# Altium PCB JacdacEc30Hub10x40 114.PcbDoc
Units mm, origin at the board's own origin, x right, y up, seen from the top; angles counter-clockwise.
Board outline 18 x 45 mm, 2 copper layers (Top Layer, Bottom Layer), stack 1.525 mm thick; 11 components, 3 nets, 79 pads, 20 vias.
Unrouted connection lines stored in the file: 7.
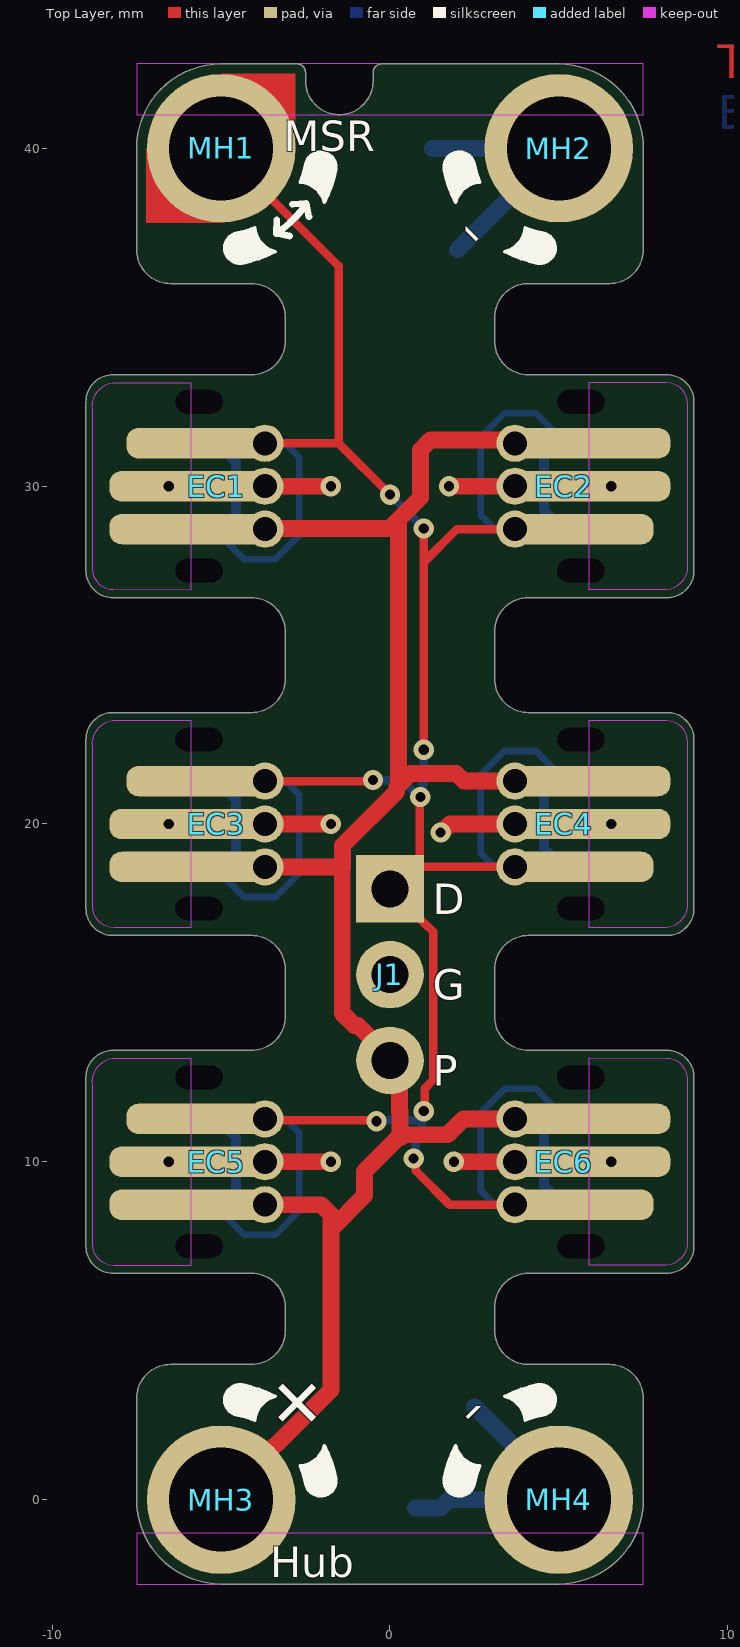
[diagram p0: Top Layer view]
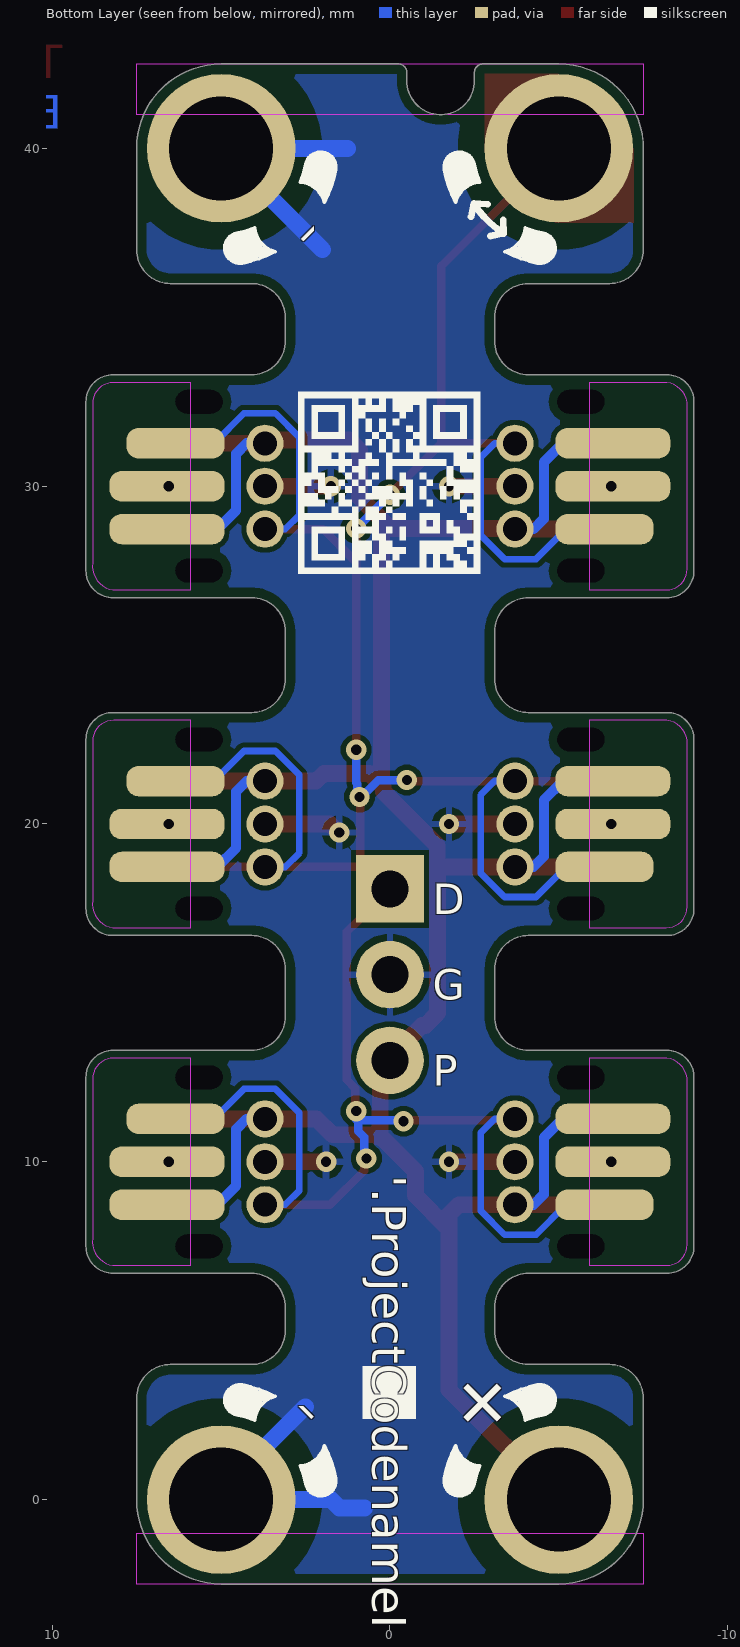
[diagram p1: Bottom Layer view, seen from below]

## Layer stack, top to bottom
Top Solder: solder mask 0.0102, Solder Resist, Dk 3.5
Top Layer: signal copper 0.0356
Dielectric 1: core 1.454, FR-4, Dk 4.2
Bottom Layer: signal copper 0.0356
Bottom Solder: solder mask 0.0102, Solder Resist, Dk 3.5

## Board outline
-7.5,0 ccw(c-5,0) -5,-2.5 5,-2.5 ccw(c5,0) 7.5,0 7.5,3.03 7.5,3 ccw(c6.5,3) 6.5,4 4.1,4 cw(c4.1,5) 3.1,5 3.1,5.7 cw(c4.1,5.7) 4.1,6.7 8.2,6.7 ccw(c8.2,7.5) 9,7.5 9,12.5 ccw(c8.2,12.5) 8.2,13.3 4.1,13.3 4.098,13.3 cw(c4.098,14.3) 3.098,14.3 3.1,14.3 3.1,15.7 cw(c4.1,15.7) 4.1,16.7 8.2,16.7 ccw(c8.2,17.5) 9,17.5 9,22.5 ccw(c8.2,22.5) 8.2,23.3 4.1,23.3 4.098,23.3 cw(c4.098,24.3) 3.098,24.3 3.1,24.3 3.1,25.7 cw(c4.1,25.7) 4.1,26.7 8.2,26.7 ccw(c8.2,27.5) 9,27.5 9,32.5 ccw(c8.2,32.5) 8.2,33.3 4.1,33.3 4.098,33.3 cw(c4.098,34.3) 3.098,34.3 3.1,34.3 3.1,35 cw(c4.1,35) 4.1,36 6.5,36 ccw(c6.5,37) 7.5,37 7.5,36.97 7.5,40 ccw(c5,40) 5,42.5 -0.25,42.5 ccw(c-0.25,42.25) -0.5,42.25 -0.5,42 cw(c-1.5,42) -2.5,42 -2.5,42.25 ccw(c-2.75,42.25) -2.75,42.5 -5,42.5 ccw(c-5,40) -7.5,40 -7.5,36.97 -7.5,37 ccw(c-6.5,37) -6.5,36 -4.1,36 cw(c-4.1,35) -3.1,35 -3.1,34.3 -3.098,34.3 cw(c-4.098,34.3) -4.098,33.3 -4.1,33.3 -8.2,33.3 ccw(c-8.2,32.5) -9,32.5 -9,27.5 ccw(c-8.2,27.5) -8.2,26.7 -4.1,26.7 cw(c-4.1,25.7) -3.1,25.7 -3.1,24.3 -3.098,24.3 cw(c-4.098,24.3) -4.098,23.3 -4.1,23.3 -8.2,23.3 ccw(c-8.2,22.5) -9,22.5 -9,17.5 ccw(c-8.2,17.5) -8.2,16.7 -4.1,16.7 cw(c-4.1,15.7) -3.1,15.7 -3.1,14.3 -3.098,14.3 cw(c-4.098,14.3) -4.098,13.3 -4.1,13.3 -8.2,13.3 ccw(c-8.2,12.5) -9,12.5 -9,7.5 ccw(c-8.2,7.5) -8.2,6.7 -4.1,6.7 cw(c-4.1,5.7) -3.1,5.7 -3.1,5 cw(c-4.1,5) -4.1,4 -6.5,4 ccw(c-6.5,3) -7.5,3 -7.5,3.03

## Design rules (kind name [scope] priority, off if disabled: settings)
AssemblyTestPointUsage [All] p1: valid=2
BoardOutlineClearance [not (HasFootprint('MOUSEBITE_CONNECTOR_3X2') or HasFootprint('MOUSEBITE_NOCONNECTOR_3'))] p1: gap=0.3 ignorepadtopadclearanceinfootprint=FALSE except(0: Arc-SplitContinuation Track-SplitContinuation SMDPad-SplitContinuation THPad-SplitContinuation Via-SplitContinuation Fill-SplitContinuation Poly-SplitContinuation Text-OutlineEdge Text-CavityEdge Text-CutoutEdge Text-SplitBarrior Text-SplitContinuation; 0.15: Region-OutlineEdge Region-CavityEdge Region-CutoutEdge Region-SplitBarrior Region-SplitContinuation)
Clearance "Clearance MH" [InComponent('MH1') OR InComponent('MH2') OR InComponent('MH3') OR InComponent('MH4')] p1: gap=0.15 ignorepadtopadclearanceinfootprint=FALSE except(0.254: Arc-Hole Track-Hole SMDPad-Hole THPad-Hole Via-Hole Fill-Hole Poly-Hole Region-Hole Text-Hole; 0.8: Arc-Fill Arc-Poly Arc-Region Track-Fill Track-Poly Track-Region SMDPad-Fill SMDPad-Poly SMDPad-Region THPad-Fill THPad-Poly THPad-Region Via-Fill Via-Poly Via-Region Fill-Fill Fill-Poly Fill-Region Poly-Poly Poly-Region Region-Region)
Clearance [All] p2: gap=0.15 ignorepadtopadclearanceinfootprint=FALSE except(0.254: Arc-Hole Track-Hole SMDPad-Hole THPad-Hole Via-Hole Fill-Hole Poly-Hole Region-Hole Text-Hole)
ComponentClearance [All] p1: gap=0.01 collisioncheckmode=3 verticalgap=0.2 showdistances=FALSE
DiffPairsRouting [All] p1: maxlimit=2 minlimit=0.15 mostfreqgap=0.15 toplayer_minwidth=0.15 toplayer_maxwidth=2 toplayer_prefwidth=0.15 bottomlayer_minwidth=0.15 bottomlayer_maxwidth=2 bottomlayer_prefwidth=0.15 substack1={CB9D278B-8BF5-444A-AAF4-837A2A9DF42D} toplayer_{cb9d278b-8bf5-444a-aaf4-837a2a9df42d}_minwidth=0.381 toplayer_{cb9d278b-8bf5-444a-aaf4-837a2a9df42d}_maxwidth=0.381 toplayer_{cb9d278b-8bf5-444a-aaf4-837a2a9df42d}_prefwidth=0.381 bottomlayer_{cb9d278b-8bf5-444a-aaf4-837a2a9df42d}_minwidth=0.381 bottomlayer_{cb9d278b-8bf5-444a-aaf4-837a2a9df42d}_maxwidth=0.381 bottomlayer_{cb9d278b-8bf5-444a-aaf4-837a2a9df42d}_prefwidth=0.381 substack2={826B8647-A721-4255-895A-19F9591B9CD1} toplayer_{826b8647-a721-4255-895a-19f9591b9cd1}_minwidth=0.381 toplayer_{826b8647-a721-4255-895a-19f9591b9cd1}_maxwidth=0.381 toplayer_{826b8647-a721-4255-895a-19f9591b9cd1}_prefwidth=0.381 bottomlayer_{826b8647-a721-4255-895a-19f9591b9cd1}_minwidth=0.381 bottomlayer_{826b8647-a721-4255-895a-19f9591b9cd1}_maxwidth=0.381 bottomlayer_{826b8647-a721-4255-895a-19f9591b9cd1}_prefwidth=0.381 substack3={E64FCAF4-1BC8-437D-B1E0-0E5F2DC0F59E} toplayer_{e64fcaf4-1bc8-437d-b1e0-0e5f2dc0f59e}_minwidth=0.381 toplayer_{e64fcaf4-1bc8-437d-b1e0-0e5f2dc0f59e}_maxwidth=0.381 toplayer_{e64fcaf4-1bc8-437d-b1e0-0e5f2dc0f59e}_prefwidth=0.381 bottomlayer_{e64fcaf4-1bc8-437d-b1e0-0e5f2dc0f59e}_minwidth=0.381 bottomlayer_{e64fcaf4-1bc8-437d-b1e0-0e5f2dc0f59e}_maxwidth=0.381 bottomlayer_{e64fcaf4-1bc8-437d-b1e0-0e5f2dc0f59e}_prefwidth=0.381 substack4={E61CE66C-507C-4E1E-8E83-C905434AFC1C} toplayer_{e61ce66c-507c-4e1e-8e83-c905434afc1c}_minwidth=0.381 toplayer_{e61ce66c-507c-4e1e-8e83-c905434afc1c}_maxwidth=0.381 toplayer_{e61ce66c-507c-4e1e-8e83-c905434afc1c}_prefwidth=0.381 bottomlayer_{e61ce66c-507c-4e1e-8e83-c905434afc1c}_minwidth=0.381 bottomlayer_{e61ce66c-507c-4e1e-8e83-c905434afc1c}_maxwidth=0.381 bottomlayer_{e61ce66c-507c-4e1e-8e83-c905434afc1c}_prefwidth=0.381 maxuncoupledlength=25
FabricationTestPointUsage [All] p1: valid=2 allowmultiple=FALSE
HoleSize [All] p1: absolutevalues=TRUE maxlimit=5 minlimit=0.3 maxpercent=80.000 minpercent=20.000
HoleToHoleClearance [IsPad and not (HasFootprint('MOUSEBITE_CONNECTOR_3X2') or HasFootprint('MOUSEBITE_NOCONNECTOR_3')) vs IsPad and not  (HasFootprint('MOUSEBITE_CONNECTOR_3X2') or HasFootprint('MOUSEBITE_NOCONNECTOR_3'))] p1: gap=0.5 allowstackedmicrovias=TRUE
MinimumAnnularRing [All] p1: minimumring=0.15
MinimumSolderMaskSliver [All] p1: minsoldermaskwidth=0.005
PlaneClearance [All] p1: clearance=0.3
PlaneConnect [All] p1: planeconnectstyle=Relief reliefexpansion=0.5 reliefentries=4 reliefconductorwidth=0.3 reliefairgap=0.3
PolygonConnect "PolygonConnect MH" [InComponent('MH1') OR InComponent('MH2') OR InComponent('MH3') OR InComponent('MH4')] p1: connectstyle=Relief reliefconductorwidth=0.5 reliefentries=4 polygonreliefangle="90 Angle" airgapwidth=0.8
PolygonConnect [All] p2: connectstyle=Relief reliefconductorwidth=0.2 reliefentries=4 polygonreliefangle="90 Angle" airgapwidth=0.2
RoutingVias [All] p1: holewidth=0.3 width=0.6 viastyle="Through Hole" minholewidth=0.3 minwidth=0.6 maxholewidth=0.3 maxwidth=0.8
SilkToSilkClearance [All] p1: silktosilkclearance=0.001
SilkToSolderMaskClearance [IsPad] p1: minsilkscreentomaskgap=0.05 clearancetoexposedcopper=TRUE
SolderMaskExpansion [All] p1: expansion=0.075 istentingtop=FALSE
UnRoutedNet [All] p1: checkbadconnections=TRUE
Width [All] p1: maxlimit=2 minlimit=0.15 preferedwidth=0.15 substack1={CB9D278B-8BF5-444A-AAF4-837A2A9DF42D} substack2={826B8647-A721-4255-895A-19F9591B9CD1} substack3={E64FCAF4-1BC8-437D-B1E0-0E5F2DC0F59E} substack4={E61CE66C-507C-4E1E-8E83-C905434AFC1C} minimp=50.000000 maximp=50.000000 favimp=50.000000
18 further rules are at their usual default settings.

## Components (designator, comment, footprint, x,y, rotation, side; value= is the part's Value field where it differs from the comment)
EC1 "Jacdac edge connector" JACDAC_EDGE_CONNECTOR_TRACES_0.15MM -3.15,30 r90 top
EC2 "Jacdac edge connector" JACDAC_EDGE_CONNECTOR_TRACES_0.15MM 3.15,30 r270 top
EC3 "Jacdac edge connector" JACDAC_EDGE_CONNECTOR_TRACES_0.15MM -3.15,20 r90 top
EC4 "Jacdac edge connector" JACDAC_EDGE_CONNECTOR_TRACES_0.15MM 3.15,20 r270 top
EC5 "Jacdac edge connector" JACDAC_EDGE_CONNECTOR_TRACES_0.15MM -3.15,10 r90 top
EC6 "Jacdac edge connector" JACDAC_EDGE_CONNECTOR_TRACES_0.15MM 3.15,10 r270 top
J1 "HDR 3x1 0.1\"" "Generic 1x3 2.54mm header" 0,15.54 r90 top
MH1 "MH_6.5MMK_4.5MMC_3.0MMD_PTH" MH_6.5MMK_4.5MMC_3.0MMD_PTH -5,40 r90 top
MH2 "MH_6.5MMK_4.5MMC_3.0MMD_PTH" MH_6.5MMK_4.5MMC_3.0MMD_PTH 5,40 r90 top
MH3 "MH_6.5MMK_4.5MMC_3.0MMD_PTH" MH_6.5MMK_4.5MMC_3.0MMD_PTH -5,0 r90 top
MH4 "MH_6.5MMK_4.5MMC_3.0MMD_PTH" MH_6.5MMK_4.5MMC_3.0MMD_PTH 5,0 r90 top

## Footprints (in the part's own frame and the unit in brackets; to place one, negate y for a bottom-side part, rotate by r counter-clockwise, add the part's x,y. Pads: shape width x height; smd on the part's side, far side on the other; paste and mask are expansions set on the pad)
"Generic 1x3 2.54mm header" [mm] "1x3 2.54mm 0.1\" header vertical th"
  rect 2x2 hole 1.1: 1(2.54,0)
  round 2 hole 1.1: 2(0,0) 3(-2.54,0)
  body extent -3.81,-1.27 3.81,1.27, height 8.64
JACDAC_EDGE_CONNECTOR_TRACES_0.15MM [mm] "Jacdac 3 pin connector with 0.15mm track-and-gap traces"
  rrect78% 0.9x2.9 smd far side paste-1 mask+0: 1(-1.27,3.2)
  rrect78% 0.9x4.3 smd paste-1 mask+0: 1(1.27,2.5)
  round 1.1 hole 0.71 paste-0.254 mask+0: 1(1.27,0.55) 2(0,0.55) 3(-1.27,0.55)
  rrect78% 0.9x3.4 smd far side paste-1 mask+0: 2(0,3.45) 2(0,3.45) 3(1.27,3.45)
  rrect78% 0.9x4.8 smd paste-1 mask+0: 2(0,2.75) 3(-1.27,2.75)
  round 0 hole 0.7 slot 1.4 at 90 deg unplated: ""(-2.5,2.5) ""(2.5,2.5)
  Top Layer keep-out region: -3.075,2.75 -3.07,5.033 -2.987,5.341 -2.761,5.567 -2.453,5.65 -2.453,5.65 2.27,5.65 2.545,5.635 2.794,5.516 2.978,5.31 3.07,5.05 3.07,5.05 3.07,2.75
  Bottom Layer lines w0.2: -1.27,3.175 -1.27,2.063 -2.159,1.174 -2.159,0.245 -1.448,-0.466 0.254,-0.466 0.854,-0.466 1.27,-0.05 1.27,0.55 ; -1.27,0.85 -1.126,0.85
  Bottom Layer lines w0.3: 1.27,1.962 0.713,1.405 -0.965,1.405 -1.27,1.1 -1.27,0.55
  Bottom Layer keep-out region: -3.07,2.75 -3.07,5.033 -3.023,5.269 -2.889,5.469 -2.689,5.603 -2.453,5.65 -2.453,5.65 2.27,5.65 2.546,5.635 2.794,5.516 2.978,5.31 3.07,5.05 3.07,5.05 3.07,2.75
MH_6.5MMK_4.5MMC_3.0MMD_PTH [mm] "Jacdac mounting hole 6.5mm clearance, 4.5 annualar ring and 3.0mm PTH"
  round 4.4 hole 3.08 mask+0.3: 1(0,0)

## Part data
EC1 EC2 EC3 EC4 EC5 EC6: "3 pin Jacdac edge connector 1.27mm pitch", Manufacturer Part Number=n/a, ComponentLink1Description="Yuliang JACDAC cable connector drawing online", ComponentLink1URL=https://github.com/microsoft/jacdac-ddk/tree/main/connector, ComponentLink2Description="JACDAC PCB edge connector spec onlin", ComponentLink2URL=https://github.com/microsoft/jacdac-ddk/tree/main/connector, Created By="D. Gakure & S. Hodges", PCB Type="1.6mm FR4"
J1: library part "Header Multicomp 2211S-03G-whitesch", "2.54mm, 3x1 way, vertical, square pin, gold plate", Manufacturer=Multicomp, Manufacturer Part Number=2211S-03G, Supplier Part Number 1=1593412, ComponentLink1Description="header strip datasheet", ComponentLink1URL=http://www.farnell.com/datasheets/1518407.pdf, Created By=daclethe, Pricing 1="50=0.0701, 100=0.0588, 500=0.0421, 1000=0.0289, 2000=0.0262, 6000=0.0238, 20000=0.0206 (GBP)", RoHS=YES, Stock 1=12851, Supplier 1=Farnell
MH1 MH2 MH3 MH4: "Mounting Hole 6.5mm keepout, 4.5mm annualar ring and 3.0mm Drill PTH"

## Via types
v1: diameter 0.6, hole 0.3, Top Layer to Bottom Layer, tented both sides, 20 vias

## Nets (pads, with @x,y where several pads share a name; then routed paths per layer and width w, separated by ;. In a path a pad name is that pad's centre, name@x,y a point inside that pad or via, vN(x,y) a via of type N, cw(c..) or ccw(c..) an arc to the next point about the centre after c; other vN are vias at no path point)
GND: EC1.2 EC2.2 EC3.2 EC4.2 EC5.2 EC6.2 J1.2 MH2.1 MH4.1 | length 28
  Top Layer w0.5: EC5.2@-3.7,10 v1(-1.75,10) ; EC3.2@-3.7,20 v1(-1.75,20) ; EC1.2@-3.7,30 v1(-1.75,30) ; v1(1.5,19.75) 1.527,19.75 1.777,20 EC4.2@3.7,20 ; v1(1.75,30) EC2.2@3.7,30 ; v1(1.89,10) EC6.2@3.7,10
  Bottom Layer w0.5: 0.75,-0.25 1.5,-0.25 1.75,0 MH4.1 5,0.25 2.5,2.75 ; 1.25,40 MH2.1 2,37
  other v1: -6.55,10 6.55,10 -6.55,20 6.55,20 -6.55,30 6.55,30
JD_DATA: EC1.1 EC2.1 EC3.1 EC4.1 EC5.1 EC6.1 J1.1 MH1.1 | length 59.7
  Top Layer w0.25: EC3.1@-5.65,21.27 -3.7,21.27 -0.53,21.27 v1(-0.5,21.3) ; MH1.1 -1.52,36.52 -1.52,31.27 ; EC5.1@-3.7,11.27 -3.665,11.235 -0.435,11.235 v1(-0.4,11.2) ; EC1.1@-3.7,31.27 -1.52,31.27 ; v1(0,29.75) -1.52,31.27 ; v1(0.7,10.1) 0.767,10.033 0.767,9.733 1.77,8.73 EC6.1@3.7,8.73 ; v1(0.9,20.8) 0.875,20.775 0.875,18.955 J1.1@0.65,18.73 ; v1(1,11.5) 1.029,11.529 1.029,12.175 1.275,12.421 1.275,16.818 1.138,16.956 1.124,16.956 J1.1 J1.1@0.25,18.33 ; v1(1,22.2) 1,27.75 ; v1(1,28.75) 1,27.75 ; EC2.1@3.7,28.73 1.98,28.73 1,27.75 ; EC4.1@5.65,18.73 3.7,18.73 J1.1@0.65,18.73 ; J1.1@0.25,18.33 J1.1@0.65,18.73 ; J1.1@0.25,18.33 J1.1@0.65,18.73
  Bottom Layer w0.25: v1(-0.5,21.3) 0.345,21.3 0.845,20.8 v1(0.9,20.8) 0.967,20.867 0.967,21.192 1,21.225 v1(1,22.2) ; v1(-0.4,11.2) -0.375,11.225 v1@0.975,11.225 ; v1(0,29.75) v1(1,28.75) ; v1(0.7,10.1) 0.767,10.167 0.767,10.734 0.933,10.9 0.933,11.183 v1@0.975,11.225 ; v1(1,11.5) 1,11.25 v1@0.975,11.225
JD_PWR: EC1.3 EC2.3 EC3.3 EC4.3 EC5.3 EC6.3 J1.3 MH3.1 | length 67.3
  Top Layer w0.5: EC5.3@-5.9,8.73 -3.7,8.73 -2.043,8.73 -1.75,8.437 -1.75,8 ; EC3.3@-5.9,18.73 -3.7,18.73 -1.412,18.73 ; EC1.3@-5.9,28.73 -3.7,28.73 -3.68,28.75 -0.01,28.75 0.24,29 0.9,29.66 0.9,31.072 1.193,31.365 3.605,31.365 3.7,31.27 EC2.3@5.9,31.27 ; MH3.1 -1.75,3.25 -1.75,8 ; 0.25,21.14 0.25,28.99 ; 0.34,10.73 0.41,10.8 1.7,10.8 2.17,11.27 3.7,11.27 EC6.3@5.9,11.27 ; EC4.3@5.9,21.27 3.7,21.27 2.189,21.27 1.959,21.5 0.61,21.5 0.2,21.09 0.2,20.96 -1.4,19.36 -1.4,18.742 -1.412,18.73 ; -1.75,8 -0.75,9 -0.75,9.72 0.3,10.77 0.3,10.8 0.3,11.49 0.287,11.503 0.287,12.713 J1.3 0,13.094 -0.943,14.037 -1.051,14.037 -1.412,14.398 -1.412,18.73
pads on no net: EC1. EC2. EC3. EC4. EC5. EC6.

## Polygon pours and split planes (outlines as drawn)
GND on Bottom Layer "NONET_L-01_P-001" (solid, pour order 2): -7.5,0 ccw(c-5,0) -5,-2.5 5,-2.5 ccw(c5,0) 7.5,0 7.5,3.03 7.5,3 ccw(c6.5,3) 6.5,4 4.1,4 cw(c4.1,5) 3.1,5 3.1,5.7 cw(c4.1,5.7) 4.1,6.7 8.2,6.7 ccw(c8.2,7.5) 9,7.5 9,12.5 ccw(c8.2,12.5) 8.2,13.3 4.1,13.3 4.098,13.3 cw(c4.098,14.3) 3.098,14.3 3.1,14.3 3.1,15.7 cw(c4.1,15.7) 4.1,16.7 8.2,16.7 ccw(c8.2,17.5) 9,17.5 9,22.5 ccw(c8.2,22.5) 8.2,23.3 4.1,23.3 4.098,23.3 cw(c4.098,24.3) 3.098,24.3 3.1,24.3 3.1,25.7 cw(c4.1,25.7) 4.1,26.7 8.2,26.7 ccw(c8.2,27.5) 9,27.5 9,32.5 ccw(c8.2,32.5) 8.2,33.3 4.1,33.3 4.098,33.3 cw(c4.098,34.3) 3.098,34.3 3.1,34.3 3.1,35 cw(c4.1,35) 4.1,36 6.5,36 ccw(c6.5,37) 7.5,37 7.5,36.97 7.5,40 ccw(c5,40) 5,42.5 -0.25,42.5 ccw(c-0.25,42.25) -0.5,42.25 -0.5,42 cw(c-1.5,42) -2.5,42 -2.5,42.25 ccw(c-2.75,42.25) -2.75,42.5 -5,42.5 ccw(c-5,40) -7.5,40 -7.5,36.97 -7.5,37 ccw(c-6.5,37) -6.5,36 -4.1,36 cw(c-4.1,35) -3.1,35 -3.1,34.3 -3.098,34.3 cw(c-4.098,34.3) -4.098,33.3 -4.1,33.3 -8.2,33.3 ccw(c-8.2,32.5) -9,32.5 -9,27.5 ccw(c-8.2,27.5) -8.2,26.7 -4.1,26.7 cw(c-4.1,25.7) -3.1,25.7 -3.1,24.3 -3.098,24.3 cw(c-4.098,24.3) -4.098,23.3 -4.1,23.3 -8.2,23.3 ccw(c-8.2,22.5) -9,22.5 -9,17.5 ccw(c-8.2,17.5) -8.2,16.7 -4.1,16.7 cw(c-4.1,15.7) -3.1,15.7 -3.1,14.3 -3.098,14.3 cw(c-4.098,14.3) -4.098,13.3 -4.1,13.3 -8.2,13.3 ccw(c-8.2,12.5) -9,12.5 -9,7.5 ccw(c-8.2,7.5) -8.2,6.7 -4.1,6.7 cw(c-4.1,5.7) -3.1,5.7 -3.1,5 cw(c-4.1,5) -4.1,4 -6.5,4 ccw(c-6.5,3) -7.5,3 -7.5,3.03
no net on Fabrication notes "NONET_L-01_P-001" (hatched 45Degree grid 0.6 track 0.01): 9.5,3 3,3 2.985,3 2.989,37.01 3,37 9.5,37 9.489,37.01
no net on Fabrication notes "NONET_L-01_P-001" (hatched 45Degree grid 0.6 track 0.01): -9.5,3 -3,3 -2.985,3 -2.989,37.01 -3,37 -9.5,37 -9.489,37.01

## Keep-outs
Keep-Out Layer:
  region: 7.5,-2.5 7.5,-1 -7.5,-1 -7.5,-2.5
  region: 7.5,41 7.5,42.5 -7.5,42.5 -7.5,41

## Other copper
Top Layer:
  region net JD_DATA: -7.215,37.8 -4.9,37.8 -2.8,39.9 -2.8,42.215 -4.985,42.215 -7.215,39.985
  text "Top Layer" at 9.701,41.75 h1.7
Bottom Layer:
  pour cut-out: -5,-2.5 ccw(c-5,0) -2.5,0 ccw(c-5,0) -5,2.5 ccw(c-5,0) -7.5,0 ccw(c-5,0)
  pour cut-out: 5,-2.5 ccw(c5,0) 7.5,0 ccw(c5,0) 5,2.5 ccw(c5,0) 2.5,0 ccw(c5,0)
  pour cut-out: 5,37.5 ccw(c5,40) 7.5,40 ccw(c5,40) 5,42.5 ccw(c5,40) 2.5,40 ccw(c5,40)
  pour cut-out: -5,37.5 ccw(c-5,40) -2.5,40 ccw(c-5,40) -5,42.5 ccw(c-5,40) -7.5,40 ccw(c-5,40)
  text "Bottom Layer" at 9.7,40.25 h1.7

## Silkscreen, mask and mechanical layers (free items; w line width, h text height)
Top Overlay:
  lines w0.1: -4.374,3.393 cw(c-5,0) -3.399,3.056 ccw(c-3.206,2.28) -4.003,2.347 ; -4.374,36.607 ccw(c-5,40) -3.399,36.944 cw(c-3.206,37.72) -4.003,37.653 ; -4.352,3.388 ccw(c-4.446,2.948) -4.539,2.508 cw(c-5,0) -4.027,2.357 ; -4.352,36.612 cw(c-4.446,37.052) -4.539,37.492 ccw(c-5,40) -4.027,37.643 ; -2.653,0.997 ccw(c-2.72,1.794) -1.944,1.601 cw(c-5,0) -1.607,0.626 ; -2.653,39.003 cw(c-2.72,38.206) -1.944,38.399 ccw(c-5,40) -1.607,39.374 ; -2.643,0.973 cw(c-5,0) -2.492,0.461 ccw(c-2.052,0.554) -1.612,0.648 ; -2.643,39.027 ccw(c-5,40) -2.492,39.539 cw(c-2.052,39.446) -1.612,39.352 ; 1.607,0.626 cw(c5,0) 1.944,1.601 ccw(c2.72,1.794) 2.653,0.997 ; 1.607,39.374 ccw(c5,40) 1.944,38.399 cw(c2.72,38.206) 2.653,39.003 ; 1.612,0.648 ccw(c2.052,0.554) 2.492,0.461 cw(c5,0) 2.643,0.973 ; 1.612,39.352 cw(c2.052,39.446) 2.492,39.539 ccw(c5,40) 2.643,39.027 ; 4.003,2.347 ccw(c3.206,2.28) 3.399,3.056 cw(c5,0) 4.374,3.393 ; 4.003,37.653 cw(c3.206,37.72) 3.399,36.944 ccw(c5,40) 4.374,36.607 ; 4.027,2.357 cw(c5,0) 4.539,2.508 ccw(c4.446,2.948) 4.352,3.388 ; 4.027,37.643 ccw(c5,40) 4.539,37.492 cw(c4.446,37.052) 4.352,36.612
  lines w0.2: -3.352,37.884 -3.366,37.484 ; -2.973,37.408 -3.366,37.484 ; -2.883,38.345 -2.484,38.366 ; -2.401,37.975 -2.484,38.366 ; -3.366,37.484 ccw(c-5,40) -2.484,38.366
  lines w0.33: -4.1,2.555 cw(c-3.759,2.698) -3.685,3.06 ; -4.1,37.445 ccw(c-3.759,37.302) -3.685,36.94 ; -2.445,0.9 ccw(c-2.302,1.241) -1.94,1.315 ; -2.445,39.1 cw(c-2.302,38.759) -1.94,38.685 ; 1.94,1.315 ccw(c2.302,1.241) 2.445,0.9 ; 1.94,38.685 cw(c2.302,38.759) 2.445,39.1 ; 3.685,3.06 cw(c3.759,2.698) 4.1,2.555 ; 3.685,36.94 ccw(c3.759,37.302) 4.1,37.445
  lines w1: -4.43,2.945 cw(c-5,0) -4.285,2.914 ; -4.43,37.055 ccw(c-5,40) -4.285,37.086 ; -2.086,0.715 cw(c-5,0) -2.055,0.57 ; -2.086,39.285 ccw(c-5,40) -2.055,39.43 ; 2.055,0.57 cw(c5,0) 2.086,0.715 ; 2.055,39.43 ccw(c5,40) 2.086,39.285 ; 4.285,2.914 cw(c5,0) 4.43,2.945 ; 4.285,37.086 ccw(c5,40) 4.43,37.055
  text "MSR" at -3.151,39.922 h0.9
  text "-" at 3.643,38.146 h3.5 r135
  text "D" at 1.273,17.33 h0.9
  text "G" at 1.273,14.79 h0.9
  text "P" at 1.273,12.25 h0.9
  text "-" at 3.146,1.357 h3.5 r45
  text "+" at -2.95,1.33 h2.8 r315
  text "Hub" at -3.547,-2.3 h0.9
Bottom Overlay:
  drawing of 247 lines, arcs and shapes, not listed
  text "Bottom Overlay" at 18.3,41.725 h1.7
  text "-" at 3.643,38.146 h3.5 r135
  text "D" at -1.273,17.33 h0.9
  text "G" at -1.273,14.79 h0.9
  text "P" at -1.273,12.25 h0.9
  text "'.ProjectCodenameID'-'.ProjectRevision'" at 0.53,9.595 h1 r90
  text "-" at 3.146,1.357 h3.5 r45
  text "+" at -2.95,1.33 h2.8 r315
Top Paste:
  text "Top Paste" at 18.301,40.318 h1.7
Bottom Paste:
  text "Bottom Paste" at 18.3,38.84 h1.7
Top Solder:
  text "Top Solder (resist)" at 18.301,37.518 h1.7
Bottom Solder:
  text "Bottom Solder (resist)" at 18.3,36.027 h1.7
Drill Guide:
  text "Drill Guide" at 31.725,37.515 h1.7
Dimension:
  circle w0.1: c5,0 r2.2
  circle w0.1: c-5,0 r3.5
  text "Dimension" at 31.725,38.815 h1.7
Fabrication notes:
  lines w0.01: -9.5,3 -3,3 ; -9.5,37 -3,37 ; -9.489,37.01 -9.485,3 ; -2.989,37.01 -2.985,3 ; 2.985,3 2.989,37.01 ; 3,3 9.5,3 ; 3,37 9.5,37 ; 9.485,3 9.489,37.01
  lines w0.1: -7.4,27.5 -6.9,27.5 -5.65,27.5 ; -7.4,32.5 -6.9,32.5 -5.65,32.5 ; 5.65,27.5 6.9,27.5 7.4,27.5 ; 5.65,32.5 6.9,32.5 7.4,32.5
  lines w0.2: -11.25,9.8 -7.4,7.5 -5.65,7.5 ; -11.25,10.2 -7.4,12.5 -5.65,12.5 ; -11.25,19.8 -7.4,17.5 -5.65,17.5 ; -11.25,20.2 -7.4,22.5 -5.65,22.5 ; -11.25,29.8 -7.4,27.5 -5.65,27.5 ; -11.25,30.2 -7.4,32.5 -5.65,32.5 ; -11.25,36 -9.5,36 ; 5.65,7.5 7.4,7.5 11.25,9.8 ; 5.65,12.5 7.4,12.5 11.25,10.2 ; 5.65,17.5 7.4,17.5 11.25,19.8 ; 5.65,22.5 7.4,22.5 11.25,20.2 ; 5.65,27.5 7.4,27.5 11.25,29.8 ; 5.65,32.5 7.4,32.5 11.25,30.2 ; 9.5,36 11.25,36
  text "Fabrication Notes" at 31.725,41.715 h1.7
  text "no board edge pips/ / rat's teeth/mouse bites  / in this region - make  / sure board edge is clean" at -27.397,34 h1.7
  text "no board edge pips/ / rat's teeth/mouse bites  / in this region - make  / sure board edge is clean" at 11.6,34 h1.7
  text "non-plated slots x2" at -22.299,29.593 h1.7
  text "non-plated slots x2" at 11.679,29.593 h1.7
  text "non-plated slots x2" at -22.299,19.593 h1.7
  text "non-plated slots x2" at 11.679,19.593 h1.7
  text "non-plated slots x2" at -22.299,9.593 h1.7
  text "non-plated slots x2" at 11.679,9.593 h1.7
Top Component Center:
  lines w0.2: -1.7,30 -0.7,30 ; -1.2,29.5 -1.2,30.5
Alignment:
  circle w0.1: c5,40 r2.5
Board Outline:
  lines w0.2: -7.5,3 cw(c-6.5,3) -6.5,4 -4.1,4 ccw(c-4.1,5) -3.1,5 -3.1,5.7 ccw(c-4.1,5.7) -4.1,6.7 ; -7.5,3.03 -7.5,0 ccw(c-5,0) -5,-2.5 5,-2.5 ccw(c5,0) 7.5,0 7.5,3.03 ; -7.5,36.97 -7.5,40 cw(c-5,40) -5,42.5 -2.75,42.5 cw(c-2.75,42.25) -2.5,42.25 -2.5,42 ccw(c-1.5,42) -0.5,42 -0.5,42.25 cw(c-0.25,42.25) -0.25,42.5 5,42.5 cw(c5,40) 7.5,40 7.5,36.97 ; -7.5,37 ccw(c-6.5,37) -6.5,36 -4.1,36 cw(c-4.1,35) -3.1,35 -3.1,34.3 ; -4.1,6.7 -8.2,6.7 cw(c-8.2,7.5) -9,7.5 -9,12.5 cw(c-8.2,12.5) -8.2,13.3 -4.1,13.3 ; -4.1,16.7 -8.2,16.7 cw(c-8.2,17.5) -9,17.5 -9,22.5 cw(c-8.2,22.5) -8.2,23.3 -4.1,23.3 ; -4.1,26.7 -8.2,26.7 cw(c-8.2,27.5) -9,27.5 -9,32.5 cw(c-8.2,32.5) -8.2,33.3 -4.1,33.3 ; -4.1,16.7 cw(c-4.1,15.7) -3.1,15.7 -3.1,14.3 ; -4.1,26.7 cw(c-4.1,25.7) -3.1,25.7 -3.1,24.3 ; -4.098,13.3 ccw(c-4.098,14.3) -3.098,14.3 ; -4.098,23.3 ccw(c-4.098,24.3) -3.098,24.3 ; -4.098,33.3 ccw(c-4.098,34.3) -3.098,34.3 ; 3.098,14.3 ccw(c4.098,14.3) 4.098,13.3 ; 3.098,24.3 ccw(c4.098,24.3) 4.098,23.3 ; 3.1,14.3 3.1,15.7 cw(c4.1,15.7) 4.1,16.7 8.2,16.7 ; 3.1,24.3 3.1,25.7 cw(c4.1,25.7) 4.1,26.7 8.2,26.7 ; 4.1,13.3 8.2,13.3 cw(c8.2,12.5) 9,12.5 9,7.5 cw(c8.2,7.5) 8.2,6.7 ; 4.1,23.3 8.2,23.3 cw(c8.2,22.5) 9,22.5 9,17.5 cw(c8.2,17.5) 8.2,16.7 ; 7.5,3 ccw(c6.5,3) 6.5,4 4.1,4 cw(c4.1,5) 3.1,5 3.1,5.7 cw(c4.1,5.7) 4.1,6.7 8.2,6.7 ; 7.5,37 cw(c6.5,37) 6.5,36 4.1,36 ccw(c4.1,35) 3.1,35 3.099,33.999 ccw(c3.797,33.999) 3.797,33.301 8.2,33.3 cw(c8.2,32.5) 9,32.5 9,27.5 cw(c8.2,27.5) 8.2,26.7
  text "Board Outline" at 31.725,40.315 h1.7
Top Assy:
  text "Top Assy" at 9.701,38.925 h1.7
Bottom Assy:
  text "Bottom Assy" at 9.7,37.525 h1.7
Drill Drawing:
  text "Drill Drawing" at 31.725,36.01 h1.7
Assembly Notes:
  lines w0.05: -7.504,17.031 -7.504,2.969 -2.15,2.969 -2.15,17.031 ; -7.504,37.031 -2.15,37.031

## Text inside footprints (layer, text, board x,y; h text height)
EC1: Mechanical 9 "Jacdac / cable connector  / body" at -13.158,25.179 h1.7 r90
EC2: Mechanical 9 "Jacdac / cable connector  / body" at 13.158,34.821 h1.7 r270
EC3: Mechanical 9 "Jacdac / cable connector  / body" at -13.158,15.179 h1.7 r90
EC4: Mechanical 9 "Jacdac / cable connector  / body" at 13.158,24.821 h1.7 r270
EC5: Mechanical 9 "Jacdac / cable connector  / body" at -13.158,5.179 h1.7 r90
EC6: Mechanical 9 "Jacdac / cable connector  / body" at 13.158,14.821 h1.7 r270